# Altium PCB in-amp.PcbDoc
Units mil, origin at the board's own origin, x right, y up, seen from the top; angles counter-clockwise.
Board outline 2100 x 1300 mil, 2 copper layers (Top Layer, Bottom Layer); 20 components, 14 nets, 48 pads, 2 vias.
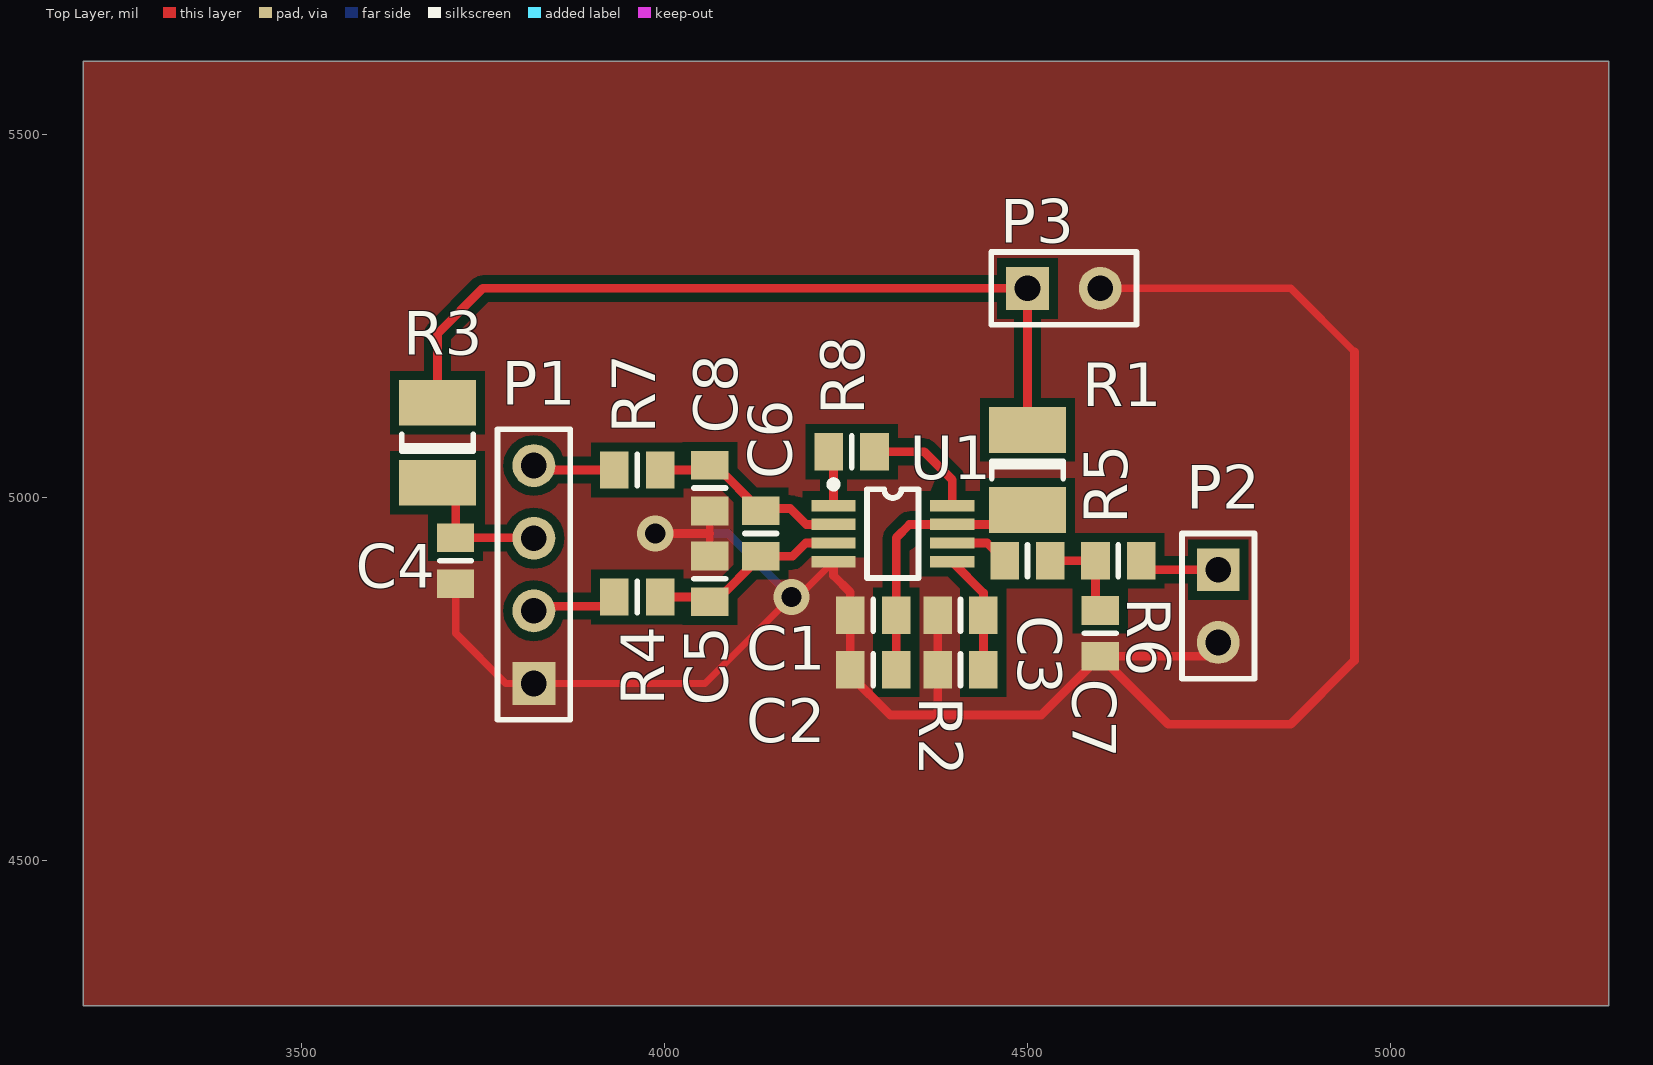
[diagram p0: Top Layer view]
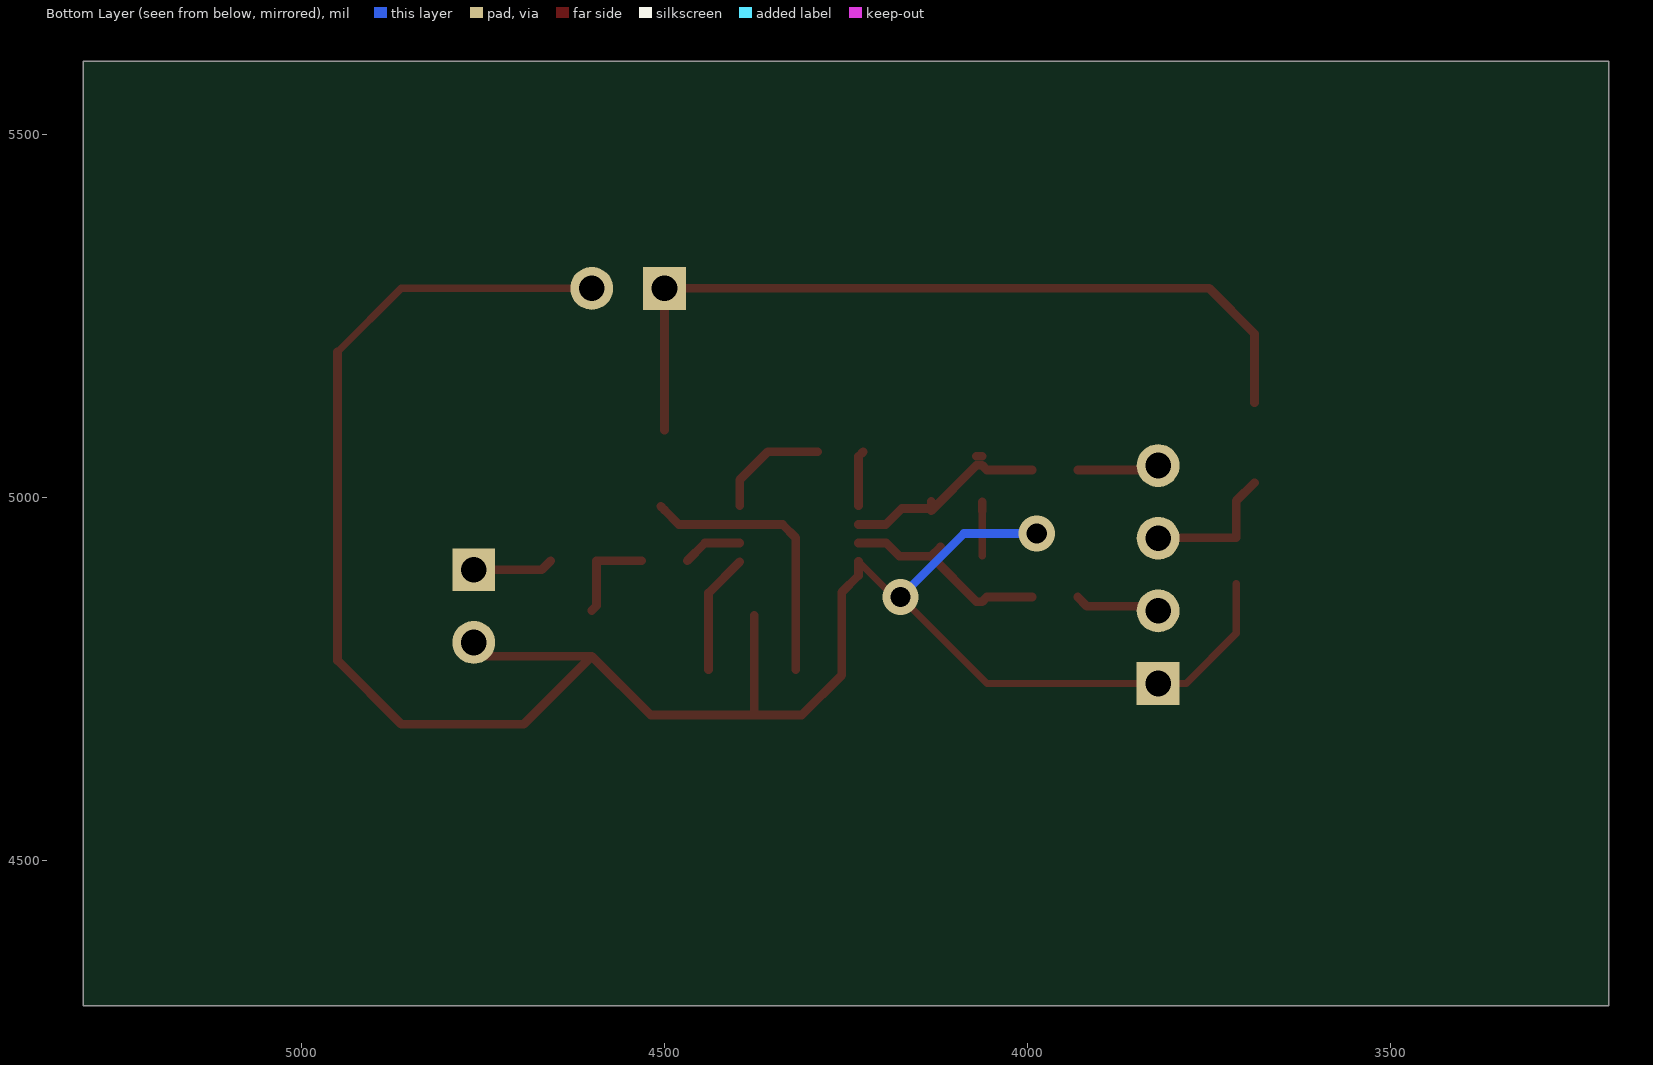
[diagram p1: Bottom Layer view, seen from below]

## Layer stack, top to bottom
Top Layer: signal copper 1.4
Dielectric: dielectric 12.6, FR-4, Dk 4.8
Bottom Layer: signal copper 1.4

## Board outline
3200,5600 5300,5600 5300,4300 3200,4300

## Design rules (kind name [scope] priority, off if disabled: settings)
Clearance [All] p1: gap=12
PlaneConnect [InNet('GND')] p1: planeconnectstyle=Relief reliefexpansion=20 reliefentries=4 reliefconductorwidth=12 reliefairgap=12
PolygonConnect [InNet('GND')] p1: connectstyle=Direct reliefconductorwidth=20 reliefentries=4 polygonreliefangle="90 Angle"
RoutingVias [All] p1: holewidth=25 width=40 viastyle="Through Hole" minholewidth=28 minwidth=50 maxholewidth=28 maxwidth=50
SilkscreenOverComponentPads [All] p1: minsilkscreentomaskgap=10
SolderMaskExpansion [All] p1: expansion=4
Width [All] p1: maxlimit=12 minlimit=10 preferedwidth=12
26 further rules are at their usual default settings.

## Components (designator, comment, footprint, x,y, rotation, side; value= is the part's Value field where it differs from the comment)
C1 "Cap" 6-0805_L 4287.5,4837.5 r0 top
C2 "Cap" 6-0805_L 4287.5,4762.5 r0 top
C3 "Cap" 6-0805_L 4407.74,4837.5 r0 top
C4 "Cap" 6-0805_L 3712.5,4912.5 r270 top
C5 "Cap" 6-0805_L 4062.5,4887.5 r270 top
C6 "Cap" 6-0805_L 4132.74,4950 r270 top
C7 "Cap" 6-0805_L 4600,4812.5 r90 top
C8 "Cap" 6-0805_L 4062.5,5012.5 r270 top
P1 "Header 4" HDR1X4 3820.24,4743.5 r90 top
P2 "Header 2" HDR1X2 4762.5,4900 r270 top
P3 "Header 2" HDR1X2 4500,5287.5 r0 top
R1 "1K" 1210 4500,5037.5 r270 top
R2 "1K" 6-0805_L 4407.74,4762.5 r180 top
R3 "1K" 1210 3687.5,5075 r90 top
R4 "1K" 6-0805_L 3962.5,4862.5 r180 top
R5 "1K" 6-0805_L 4500,4912.5 r180 top
R6 "1K" 6-0805_L 4625,4912.5 r180 top
R7 "1K" 6-0805_L 3962.5,5037.5 r180 top
R8 "1K" 6-0805_L 4257.74,5062.5 r0 top
U1 "INA326" MSOP8 4314.43,4949.7 r270 top

## Footprints (in the part's own frame and the unit in brackets; to place one, negate y for a bottom-side part, rotate by r counter-clockwise, add the part's x,y. Pads: shape width x height; smd on the part's side, far side on the other; paste and mask are expansions set on the pad)
6-0805_L [mm] "Chip Resistor, Body 2.0x1.2mm, IPC High Density"
  rect 1x1.3 smd: 1(-0.8,0) 2(0.8,0)
  silkscreen extent 0,-0.55 0,0.55, body extent -1.07,-0.7 1.07,0.7, height 0.7
1210 [mm] "Chip Capacitor; Body 3.2 x 2.5 mm (LxW typ)"
  rect 1.6x2.7 smd: 1(-1.4,0) 2(1.4,0)
  silkscreen extent -0.3,-1.25 0.3,1.25
HDR1X2 [mm] "Connector; Header; 2 Position"
  rect 1.5x1.5 hole 0.9: 1(0,0)
  round 1.5 hole 0.9: 2(2.54,0)
  silkscreen extent -1.27,-1.27 3.81,1.27
HDR1X4 [mm] "Connector; Header; 4 Position"
  rect 1.5x1.5 hole 0.9: 1(0,0)
  round 1.5 hole 0.9: 2(2.54,0) 3(5.08,0) 4(7.62,0)
  silkscreen extent -1.27,-1.27 8.89,1.27
MSOP8 [mm] "Shrink Small Outline; 8 Leads; Body Width 3 mm; Pitch 0.65 mm"
  rect 0.4x1.55 smd: 1(-0.975,-2.075) 2(-0.325,-2.075) 3(0.325,-2.075) 4(0.975,-2.075) 5(0.975,2.075) 6(0.325,2.075) 7(-0.325,2.075) 8(-0.975,2.075)
  silkscreen extent -1.85,-2.2 1.55,0.9

## Part data
C1 C2 C3 C4 C5 C6 C7 C8: "Capacitor"
P1: "Header, 4-Pin"
P2 P3: "Header, 2-Pin"
R1 R2 R3 R4 R5 R6 R7 R8: library part Res1, "Resistor"
U1: "in-amp"

## Via types
v1: diameter 50, hole 28, Top Layer to Bottom Layer, 2 vias

## Nets (pads, with @x,y where several pads share a name; then routed paths per layer and width w, separated by ;. In a path a pad name is that pad's centre, name@x,y a point inside that pad or via, vN(x,y) a via of type N, cw(c..) or ccw(c..) an arc to the next point about the centre after c; other vN are vias at no path point)
GND: C1.1 C2.1 C3.1 C4.2 C5.1 C7.1 C8.2 P1.1 P2.2 P3.2 R2.2 U1.4 | length 3183.6
  Top Layer w10: C4.2 3712.5,4812.5 3781.5,4743.5 P1.1 4056,4743.5 v1(4175,4862.5) 4183.92,4862.5 U1.4 ; C5.1 4062.5,4950 C8.2 ; P3.2@4587.5,5287.5 P3.2 4862.5,5287.5 4950,5200
  Top Layer w12: v1(3987.5,4950) 4062.5,4950 ; C8.2 C8.2@4062.5,4993.5 ; U1.4 4232.74,4892.26 4256,4869 C1.1 C2.1 4256,4754.76 4310.76,4700 4375,4700 ; C3.1 R2.2 4376.24,4701.24 4375,4700 ; P2.2 4743.5,4781 C7.1 ; 4950,5200 4950,4775 4862.5,4687.5 4693.5,4687.5 C7.1 ; 4375,4700 4519,4700 C7.1
  Bottom Layer w12: v1(3987.5,4950) 4087.5,4950 v1(4175,4862.5)
NetC1_2: C1.2 C2.2 R1.2 U1.7 | length 385.6
  Top Layer w12: C2.2 C1.2 4319,4944 4337.5,4962.5 U1.7 4480.12,4962.5 R1.2 R1.2@4505.12,4987.5
NetC3_2: C3.2 R2.1 U1.5 | length 166.4
  Top Layer w12: U1.5@4396.13,4911.04 4439.24,4867.93 C3.2 R2.1
NetC4_1: C4.1 P1.3 R3.1 | length 194.2
  Top Layer w12: R3.1 3712.5,4994.88 C4.1 3819.75,4944 P1.3
NetC5_2: C5.2 C6.2 R4.1 U1.3 | length 293.3
  Top Layer w12: R4.1 4056,4862.5 C5.2 4070.24,4856 C6.2 ; C6.2@4119.75,4931.5 C6.2 ; U1.3 4194.65,4936.91 4176.24,4918.5 C6.2
NetC6_1: C6.1 C8.1 R7.1 U1.2 | length 296.7
  Top Layer w12: R7.1 4056,5037.5 C8.1 4070.24,5044 C6.1 C6.1@4132.74,4984.5 ; C8.1@4062.5,5056.5 C8.1@4070.24,5056.5 ; C6.1@4132.74,4994 C6.1@4132.74,4984.5 ; U1.2 4195.24,4962.5 4173.24,4984.5 C6.1@4132.74,4984.5
NetC7_2: C7.2 R5.1 R6.2 | length 133.2
  Top Layer w12: R5.1 R6.2 4593.5,4850.49 C7.2
NetP1_2: P1.2 R4.2 | length 118.6
  Top Layer w12: P1.2 3826.74,4850 3918.5,4850 R4.2
NetP1_4: P1.4 R7.2 | length 113.3
  Top Layer w12: P1.4 3826.24,5037.5 R7.2
NetP2_1: P2.1 R6.1 | length 111.2
  Top Layer w12: R6.1 4669,4900 P2.1
NetR5_2: R5.2 U1.6 | length 82.5
  Top Layer w12: U1.6 4444.09,4936.91 R5.2
NetR8_1: R8.1 U1.1 | length 77.1
  Top Layer w12: R8.1 4232.74,5056 U1.1
NetR8_2: R8.2 U1.8 | length 158.5
  Top Layer w12: R8.2 4357.74,5062.5 4396.13,5024.11 U1.8@4396.13,4988.37
VCC: P3.1 R1.1 R3.2 | length 1128.2
  Top Layer w12: R3.2 3687.5,5225 3750,5287.5 P3.1 R1.1

## Polygon pours and split planes (outlines as drawn)
GND on Top Layer "Top Layer-No Net" (solid, remove dead copper, pour order 6): 3200,5600 5300,5600 5300,4300 3200,4300 3200,5600

## Silkscreen, mask and mechanical layers (free items; w line width, h text height)
Mechanical 1:
  the board outline again, w10